# Altium PCB MicroMouse.PcbDoc (part 1 of 2)
Units mm, origin at the board's own origin, x right, y up, seen from the top; angles counter-clockwise.
Board outline 120.52 x 100.98 mm, 4 copper layers (Top Copper, Signal Layer 1, Signal Layer 2, Bottom Copper), stack 1.57 mm thick; 103 components, 72 nets, 374 pads, 447 vias.
Unrouted connection lines stored in the file: 1.
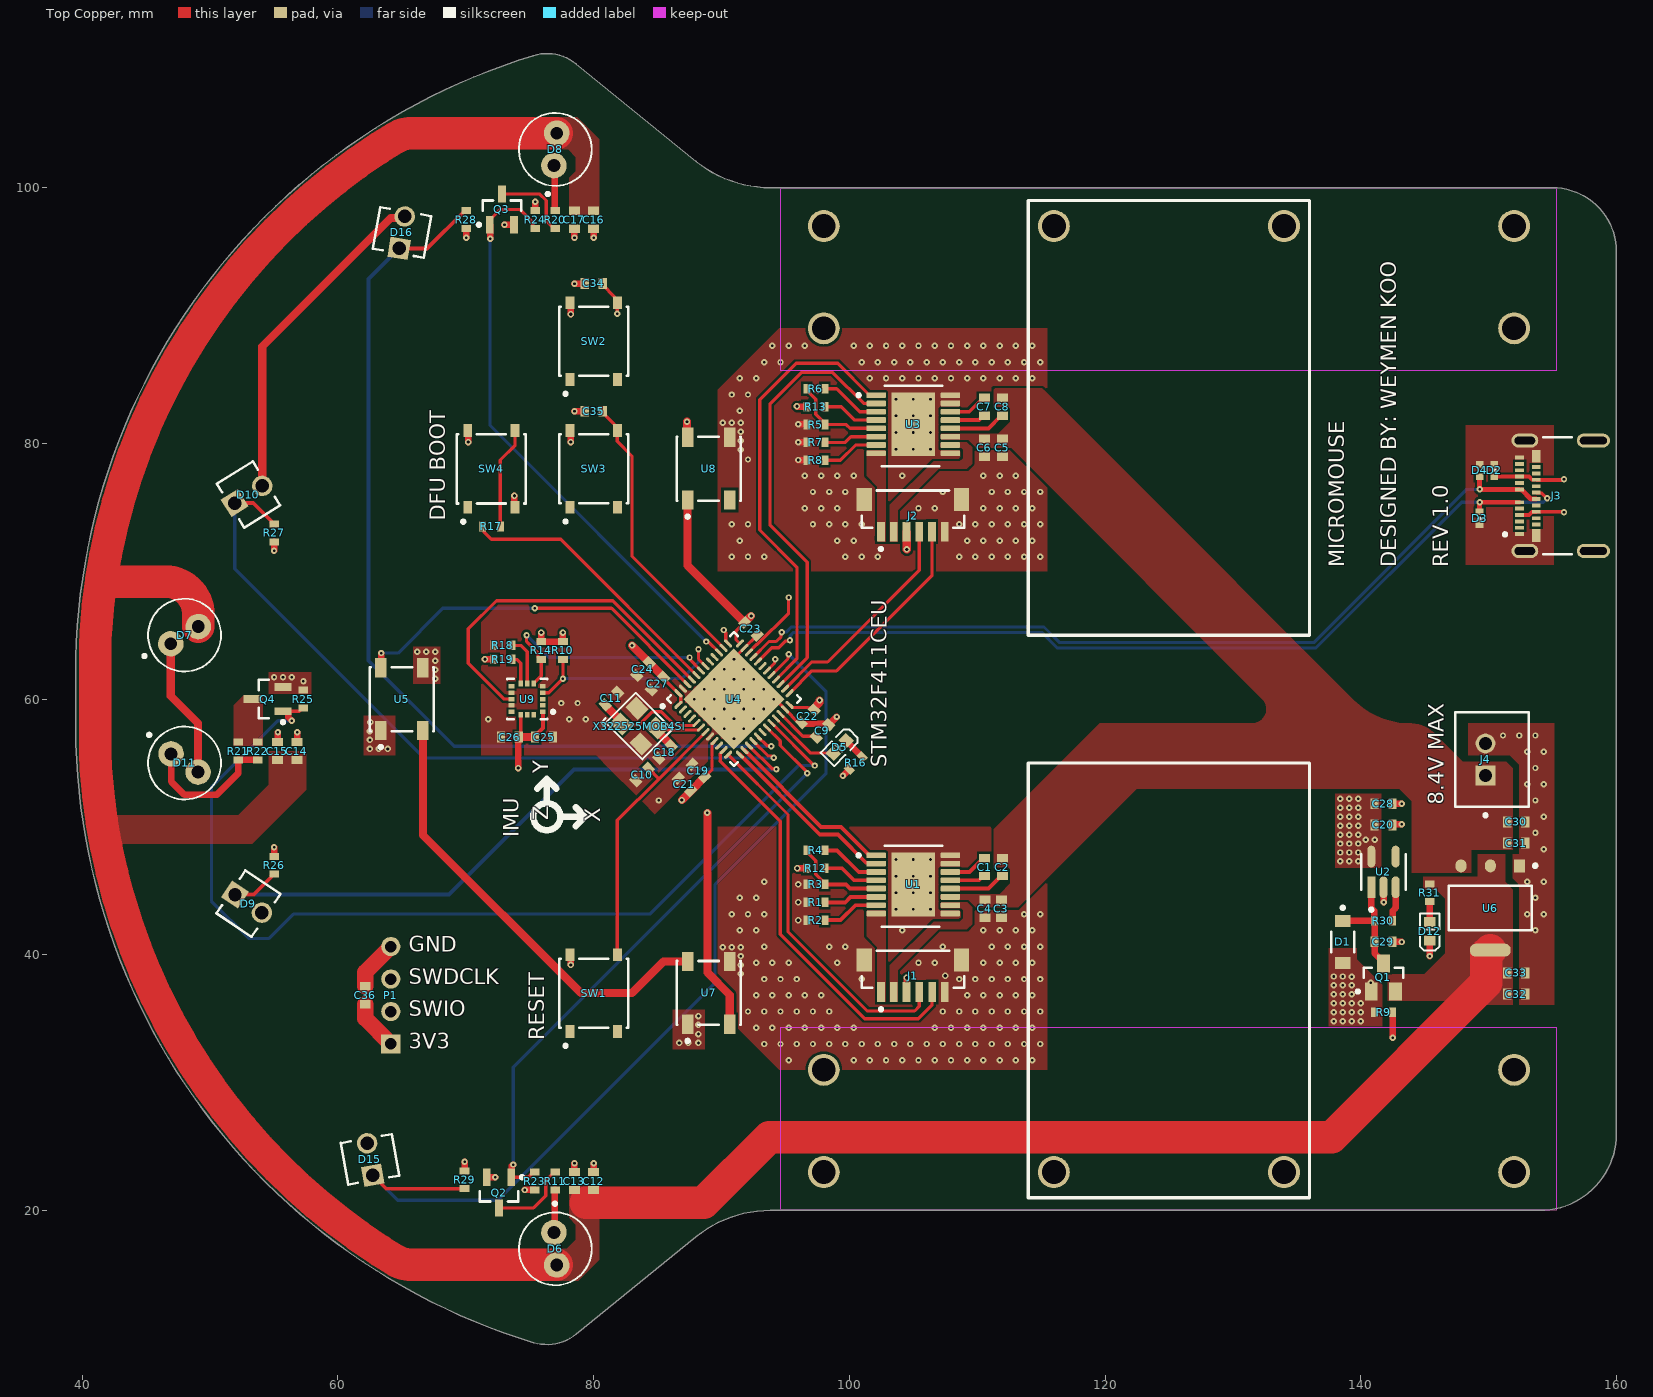
[diagram p0: Top Copper view]
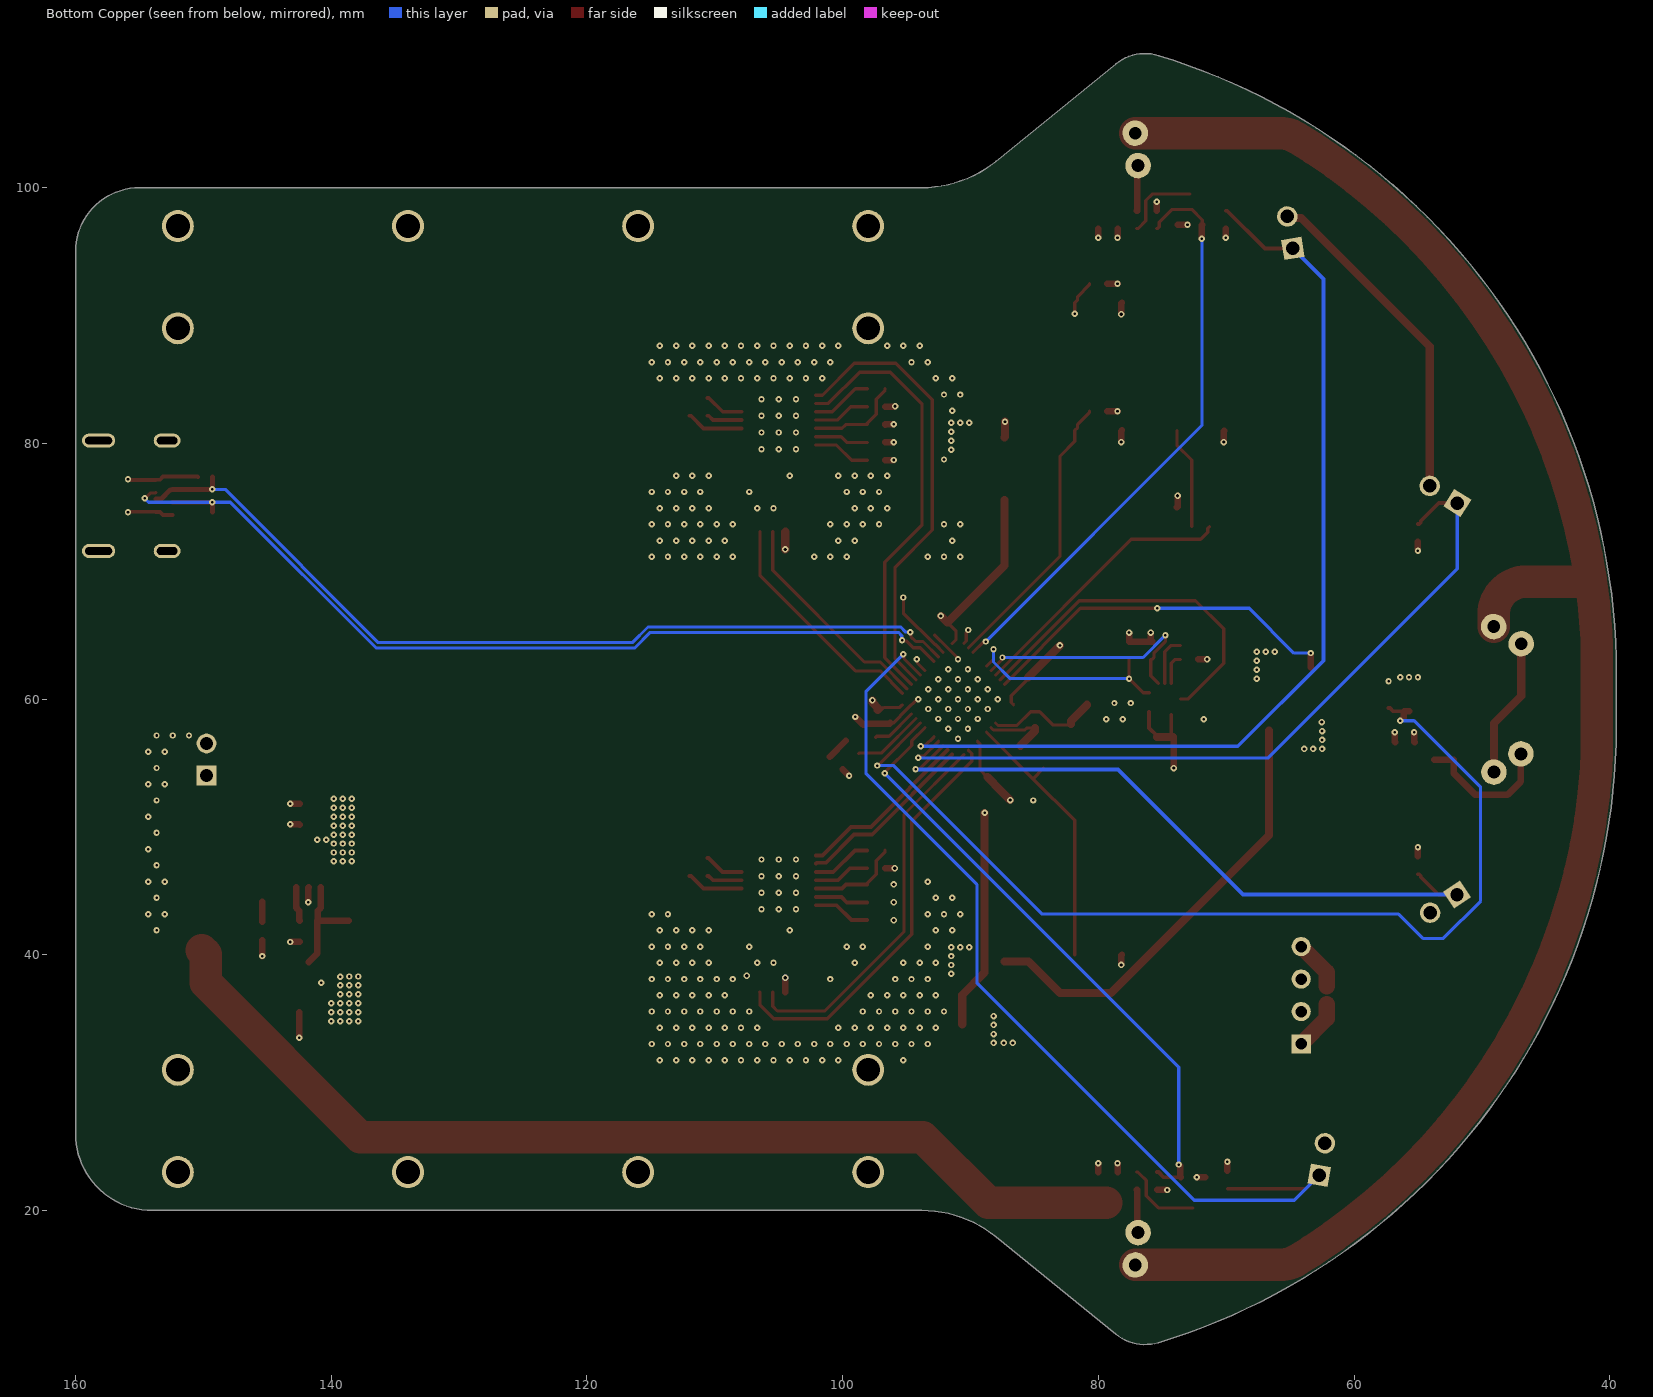
[diagram p1: Bottom Copper view, seen from below]
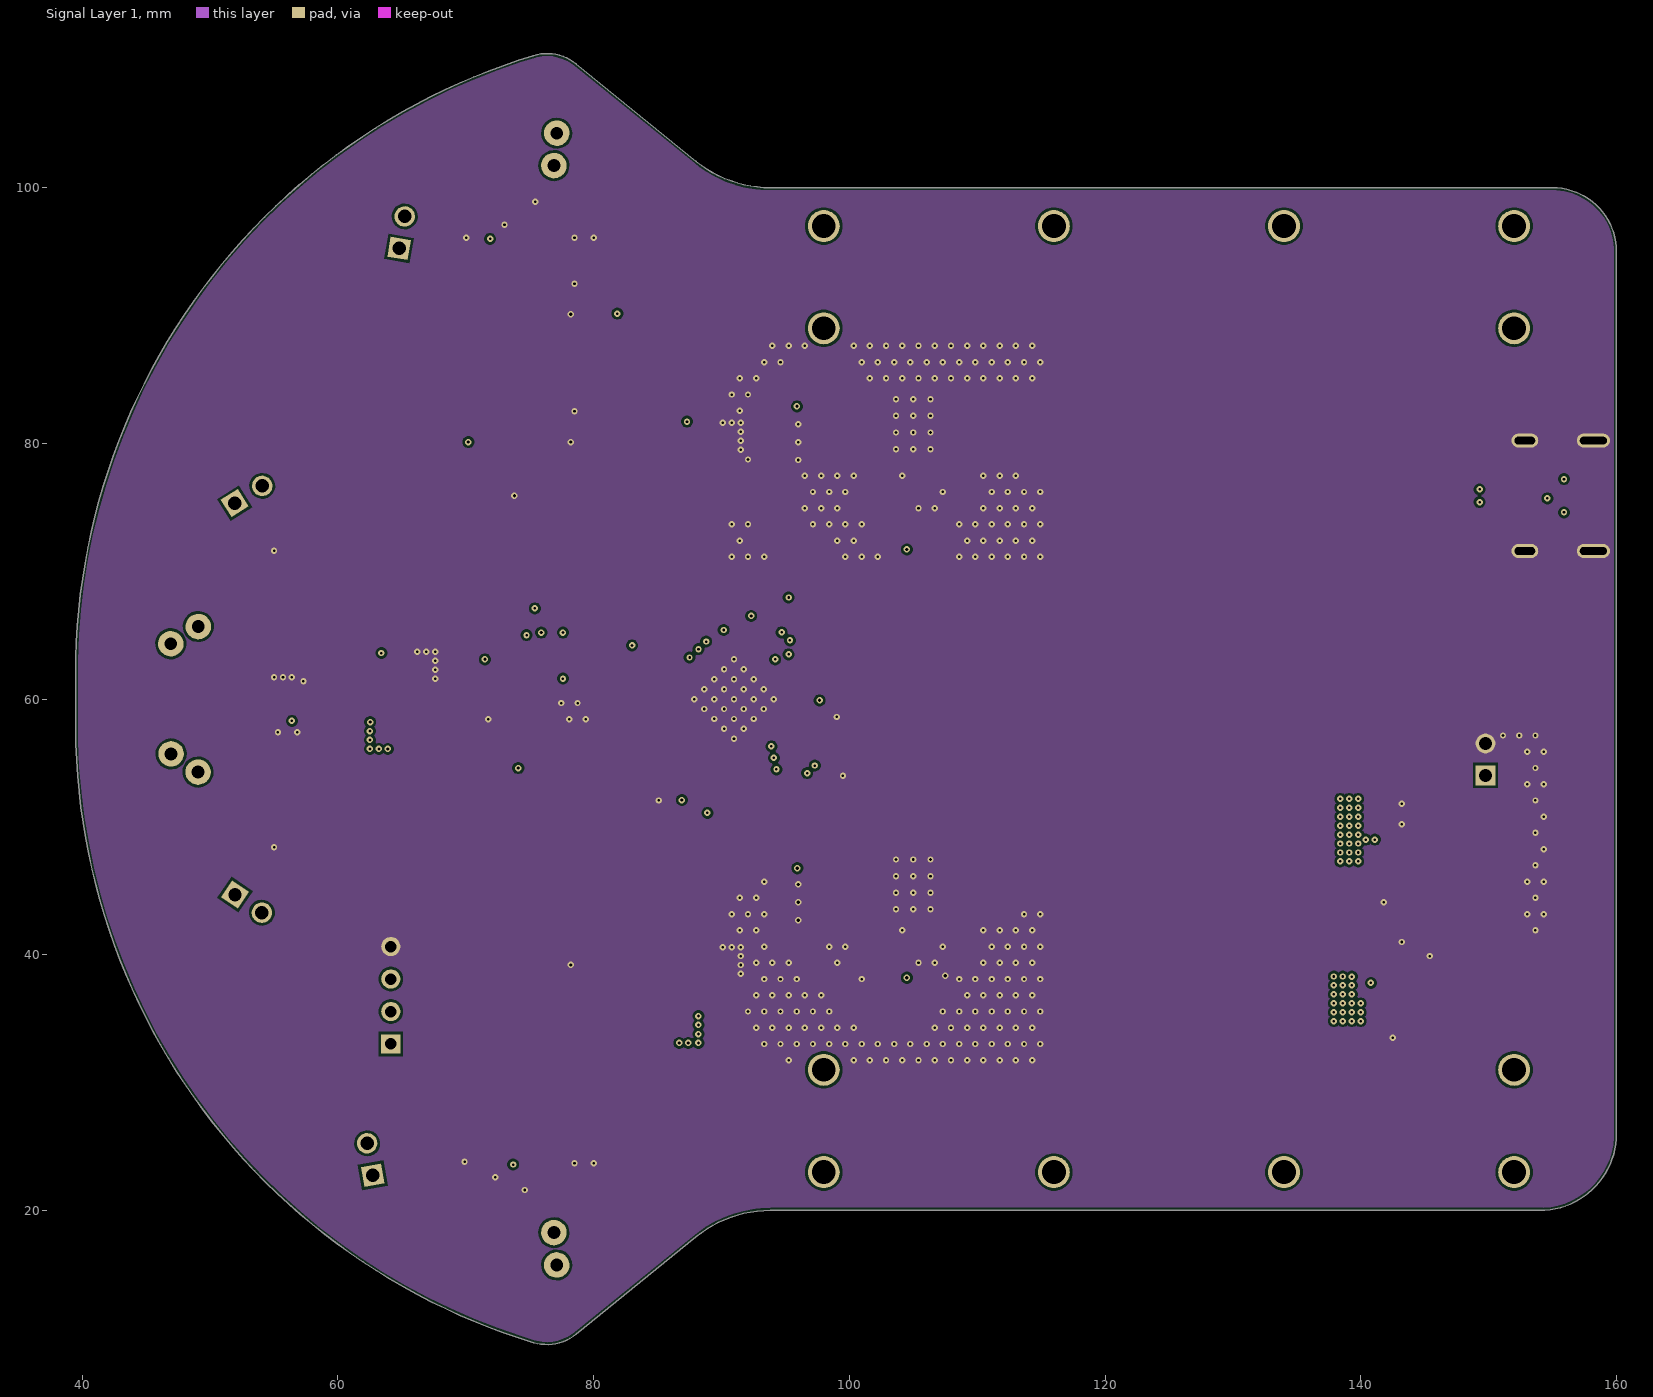
[diagram p2: Signal Layer 1]
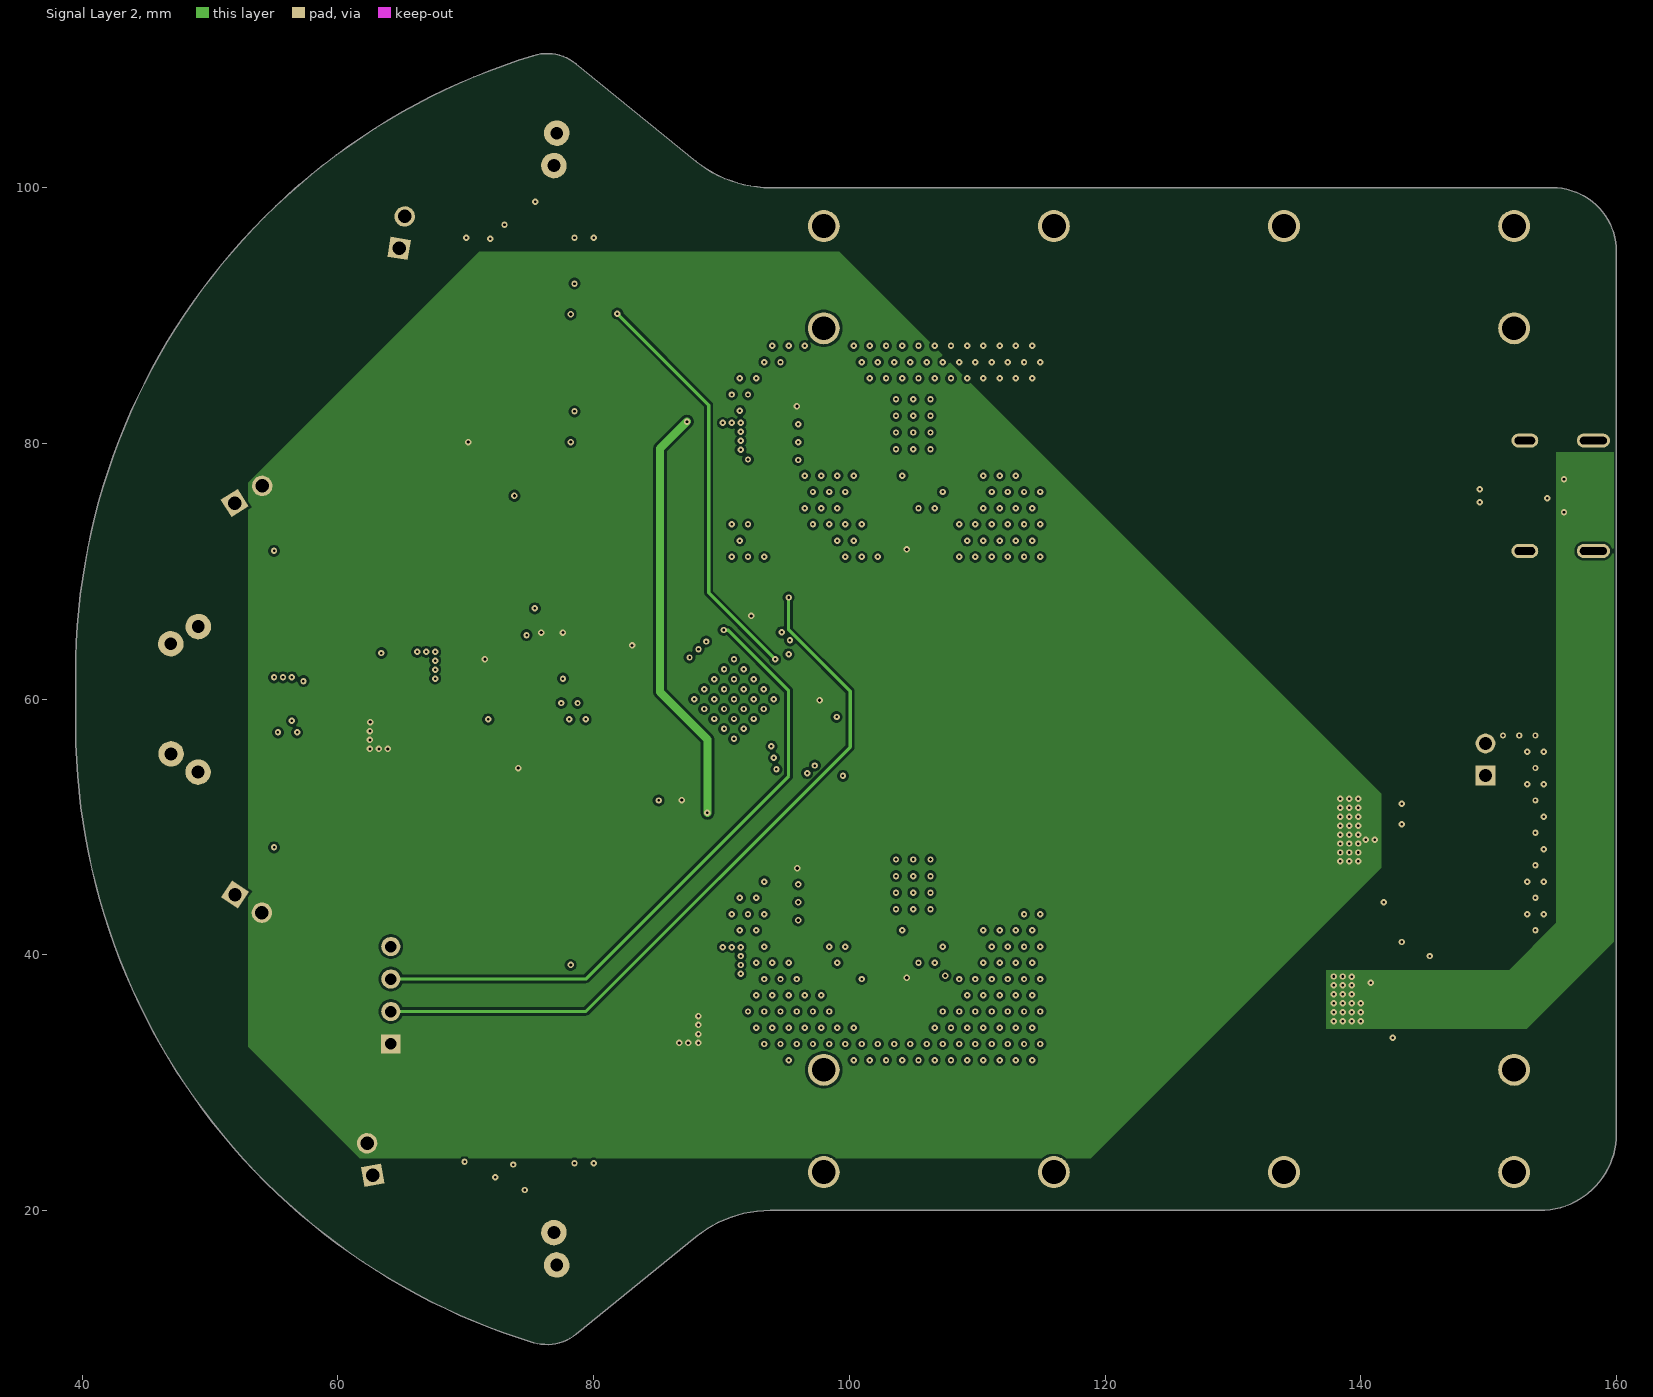
[diagram p3: Signal Layer 2]

## Layer stack, top to bottom
Top Mask: solder mask 0.015, Solder Resist, Dk 3.8
Top Copper: signal copper 0.035
Dielectric 1: prepreg 0.1, 2313, Dk 4.05
Signal Layer 1: signal copper 0.0175
Core: core 1.265, FR-4, Dk 4.5
Signal Layer 2: signal copper 0.0175
Dielectric 2: prepreg 0.1, 2313, Dk 4.05
Bottom Copper: signal copper 0.035
Bottom Mask: solder mask 0.015, Solder Resist, Dk 3.8

## Board outline
93.819,20 154,20 ccw(c154,26) 160,26 160,95 ccw(c155,95) 155,100 93.819,100 cw(c93.819,109.203) 88.02,102.057 78.624,109.682 ccw(c76.345,106.874) 75.292,110.334 ccw(c90,62) 39.478,62 39.479,57.699 ccw(c89.999,57.999) 75.294,9.666 ccw(c76.346,13.124) 78.624,10.318 88.019,17.943 cw(c93.819,10.796)

## Design rules (kind name [scope] priority, off if disabled: settings)
BoardOutlineClearance [All] p1: gap=0.2 ignorepadtopadclearanceinfootprint=FALSE except(0.4: Arc-SplitBarrior Arc-SplitContinuation Track-SplitBarrior Track-SplitContinuation SMDPad-SplitBarrior SMDPad-SplitContinuation THPad-SplitBarrior THPad-SplitContinuation Via-SplitBarrior Via-SplitContinuation Fill-SplitBarrior Fill-SplitContinuation Poly-SplitBarrior Poly-SplitContinuation Region-SplitBarrior Region-SplitContinuation Text-SplitBarrior Text-SplitContinuation)
Clearance "Clearance Bottom Layer" [OnLayer('Bottom Layer')] p1: gap=0.203 ignorepadtopadclearanceinfootprint=TRUE except(0.076: Arc-SMDPad Track-SMDPad SMDPad-SMDPad; 0.254: Arc-Text Track-Text SMDPad-Text THPad-Text Via-Text Fill-Text Poly-Text Region-Text Text-Text)
Clearance "Clearance Top Layer" [OnLayer('Top Layer')] p2: gap=0.203 ignorepadtopadclearanceinfootprint=TRUE except(0.076: Arc-SMDPad Track-SMDPad SMDPad-SMDPad; 0.254: Arc-Text Track-Text SMDPad-Text THPad-Text Via-Text Fill-Text Poly-Text Region-Text Text-Text)
Clearance [All] p3: gap=0.2 ignorepadtopadclearanceinfootprint=FALSE except(0.076: Arc-SMDPad Track-SMDPad SMDPad-SMDPad; 0.089: Arc-Arc Arc-Track Track-Track; 0.127: Arc-Via Track-Via SMDPad-Via THPad-Via Via-Via; 0.254: Arc-Text Track-Text SMDPad-Text THPad-Text Via-Text Fill-Text Poly-Text Region-Text Text-Text)
DiffPairsRouting [All] p1: maxlimit=0.254 minlimit=0.127 mostfreqgap=0.203 toplayer_minwidth=0.254 toplayer_maxwidth=0.381 toplayer_prefwidth=0.254 midlayer1_minwidth=0.254 midlayer1_maxwidth=0.381 midlayer1_prefwidth=0.254 midlayer2_minwidth=0.254 midlayer2_maxwidth=0.381 midlayer2_prefwidth=0.254 bottomlayer_minwidth=0.254 bottomlayer_maxwidth=0.381 bottomlayer_prefwidth=0.254 maxuncoupledlength=12.7
HoleSize [All] p1: absolutevalues=TRUE maxlimit=6.3 minlimit=0.2 maxpercent=80.000 minpercent=20.000
MinimumAnnularRing [All] p1: minimumring=0.076
MinimumSolderMaskSliver [All] p1: minsoldermaskwidth=0.018
PolygonConnect PolygonConnect_1 [All] p1: connectstyle=Direct reliefconductorwidth=0.508 reliefentries=4 polygonreliefangle="90 Angle" airgapwidth=0.254
RoutingCorners [All] p1: cornerstyle=Round minsetback=2.54 maxsetback=2.54
RoutingVias [All] p1: holewidth=0.5 width=1 viastyle="Through Hole" minholewidth=0.2 minwidth=0.45 maxholewidth=1 maxwidth=2
SilkToSilkClearance [All] p1: silktosilkclearance=0.025
SilkToSolderMaskClearance [IsPad] p1: minsilkscreentomaskgap=0.025 clearancetoexposedcopper=TRUE
SolderMaskExpansion [All] p1: expansion=0.102 istentingtop=FALSE
Width [All] p1: maxlimit=2.54 minlimit=0.089 preferedwidth=0.381
24 further rules are at their usual default settings.

## Classes and differential pairs
net class USB: MCU_USB_D_N MCU_USB_D_P
differential pair MCU_USB_D: +MCU_USB_D_P -MCU_USB_D_N

## Components (designator, comment, footprint, x,y, rotation, side; value= is the part's Value field where it differs from the comment)
C1 "0.022uF" "IPC C C0603 No Silk" 110.579,46.856 r270 top value=?F
C2 "0.1uF" "IPC C C0603 No Silk" 111.976,46.856 r270 top value=?F
C3 "4.7uF" "IPC C C0603 No Silk" 111.9,43.6 r270 top value=?F
C4 "0.1uF" "IPC C C0603 No Silk" 110.6,43.6 r270 top value=?F
C5 "4.7uF" "IPC C C0603 No Silk" 111.971,79.665 r270 top value=?F
C6 "0.1uF" "IPC C C0603 No Silk" 110.571,79.665 r270 top value=?F
C7 "0.022uF" "IPC C C0603 No Silk" 110.571,82.865 r270 top value=?F
C8 "0.1uF" "IPC C C0603 No Silk" 111.971,82.865 r270 top value=?F
C9 "2.2uF" "IPC C C0603 No Silk" 97.9,57.509 r225 top value=?F
C10 "100nF" "IPC C C0603 No Silk" 83.8,54.1 r225 top value=?F
C11 "15pF" "IPC C C0603 No Silk" 81.39,60.049 r45 top value=?F
C12 "100nF" "IPC C C0603 No Silk" 80,22.3 r270 top value=?F
C13 "4.7uF" "IPC C C0603 No Silk" 78.5,22.3 r270 top value=?F
C14 "100nF" "IPC C C0603 No Silk" 56.786,55.936 r270 top value=?F
C15 "4.7uF" "IPC C C0603 No Silk" 55.262,55.936 r270 top value=?F
C16 "100nF" "IPC C C0603 No Silk" 80,97.5 r90 top value=?F
C17 "4.7uF" "IPC C C0603 No Silk" 78.5,97.5 r90 top value=?F
C18 "15pF" "IPC C C0603 No Silk" 85.581,55.858 r225 top value=?F
C19 "2.2uF" "IPC C C0603 No Silk" 88.182,54.396 r315 top value=?F
C20 "10uF" "IPC C C0603 No Silk" 141.78,50.161 r180 top value=?F
C21 "100nF" "IPC C C0603 No Silk" 87.105,53.318 r135 top value=?F
C22 "100nF" "IPC C C0603 No Silk" 96.757,58.652 r225 top value=?F
C23 "100nF" "IPC C C0603 No Silk" 92.3,65.5 r315 top value=?F
C24 "100nF" "IPC C C0603 No Silk" 83.857,62.343 r225 top value=?F
C25 "10uF" "IPC C C0603 No Silk" 76.119,57.031 r0 top value=?F
C26 "100nF" "IPC C C0603 No Silk" 73.452,57.031 r180 top value=?F
C27 "100nF" "IPC C C0603 No Silk" 85,61.2 r225 top value=?F
C28 "1uF" "IPC C C0603 No Silk" 141.78,51.812 r180 top value=?F
C29 "10uF" "IPC C C0603 No Silk" 141.78,41.017 r180 top value=?F
C30 "10uF" "IPC C C0603 No Silk" 152.173,50.387 r0 top value=?F
C31 "100nF" "IPC C C0603 No Silk" 152.173,48.736 r0 top value=?F
C32 "10uF" "IPC C C0603 No Silk" 152.173,36.925 r0 top value=?F
C33 "100nF" "IPC C C0603 No Silk" 152.173,38.576 r0 top value=?F
C34 "100nF" "IPC C C0603 No Silk" 80,92.512 r180 top value=?F
C35 "100nF" "IPC C C0603 No Silk" 80,82.512 r180 top value=?F
C36 "100nF" "IPC C C0603 No Silk" 62.135,36.83 r90 top value=?F
D1 "MBR0540" FP-425-04-MFG 138.6,41 r270 top
D2 "RCLAMP0521P-N" 0402-TVS 150.441,77.876 r90 top
D3 "RCLAMP0521P-N" 0402-TVS 149.298,74.138 r270 top
D4 "RCLAMP0521P-N" 0402-TVS 149.304,77.876 r90 top
D5 "LED" LED0603-FD_BLUE 99.25,56.25 r45 top
D6 "SFH 4545" FP-SFH_4556-MFG 77,17 r275 top
D7 "SFH 4545" FP-SFH_4556-MFG 48,65 r32 top
D8 "SFH 4545" FP-SFH_4556-MFG 77,102.997 r85 top
D9 "TEFT4300" FP-6_544-5269_01-4-MFG 53,44 r326 top
D10 "TEFT4300" FP-6_544-5269_01-4-MFG 53,76 r32 top
D11 "SFH 4545" FP-SFH_4556-MFG 48,55 r326 top
D12 "LED" LED0603-FD_BLUE 145.4,41.844 r270 top
D15 "TEFT4300" FP-6_544-5269_01-4-MFG 62.5,24 r100 top
D16 "TEFT4300" FP-6_544-5269_01-4-MFG 65,96.5 r80 top
J1 "BM06B-SRSS-TBT(LF)(SN)" FP-BM06B-SRSS-TBT_LF_SN-MFG 104.976,38.856 r0 top
J2 "BM06B-SRSS-TBT(LF)(SN)" FP-BM06B-SRSS-TBT_LF_SN-MFG 104.971,74.865 r0 top
J3 "1054500101" FP-1054500101-MFG 156.2,75.9 r90 top
J4 "B2B-XH-A(LF)(SN)" FP-B2B-XH-A_LF_SN-MFG 150.284,55.278 r90 top
P1 "Header 4H" HDR1X4H 64.135,33.02 r90 top
Q1 "FDV304P" FAIR-SOT23-3_V 141.78,38.223 r90 top
Q2 "2N7002" INF-PG-SOT23_M 72.6,21.4 r270 top
Q3 "2N7002" INF-PG-SOT23_M 72.825,98.3 r90 top
Q4 "2N7002" INF-PG-SOT23_M 54.5,60 r180 top
R1 "2.49k" "IPC C R0603 No Silk" 97.38,44.103 r0 top value=?
R2 "20k" "IPC C R0603 No Silk" 97.38,42.706 r0 top value=?
R3 "0" "IPC C R0603 No Silk" 97.38,45.5 r180 top value=?
R4 "10k" "IPC C R0603 No Silk" 97.38,48.167 r180 top value=?
R5 "0" "IPC C R0603 No Silk" 97.38,81.475 r180 top value=?
R6 "10k" "IPC C R0603 No Silk" 97.38,84.269 r180 top value=?
R7 "2.49k" "IPC C R0603 No Silk" 97.38,80.078 r0 top value=?
R8 "20k" "IPC C R0603 No Silk" 97.38,78.681 r0 top value=?
R9 "100k" "IPC C R0603 No Silk" 141.791,35.496 r180 top value=?
R10 "2.2k" "IPC C R0603 No Silk" 77.6,63.8 r90 top value=?
R11 "10R" "IPC C R0603 No Silk" 77,22.3 r270 top value=?
R12 "10k" "IPC C R0603 No Silk" 97.38,46.77 r0 top value=?
R13 "10k" "IPC C R0603 No Silk" 97.38,82.872 r0 top value=?
R14 "2.2k" "IPC C R0603 No Silk" 75.9,63.8 r90 top value=?
R16 "1k" "IPC C R0603 No Silk" 100.5,55 r45 top value=?
R17 "10k" "IPC C R0603 No Silk" 72,73.5 r180 top value=?
R18 "10k" "IPC C R0603 No Silk" 72.9,64.2 r0 top value=?
R19 "10k" "IPC C R0603 No Silk" 72.9,63.1 r0 top value=?
R20 "10R" "IPC C R0603 No Silk" 77,97.5 r90 top value=?
R21 "5.6R" "IPC C R0603 No Silk" 52.214,55.936 r90 top value=?
R22 "5.6R" "IPC C R0603 No Silk" 53.738,55.936 r90 top value=?
R23 "4.7k" "IPC C R0603 No Silk" 75.4,22.3 r90 top value=?
R24 "4.7k" "IPC C R0603 No Silk" 75.425,97.5 r270 top value=?
R25 "4.7k" "IPC C R0603 No Silk" 57.3,60 r270 top value=?
R26 "1.8k" "IPC C R0603 No Silk" 55,47 r270 top value=?
R27 "1.8k" "IPC C R0603 No Silk" 55,73 r90 top value=?
R28 "1.8k" "IPC C R0603 No Silk" 70.025,97.5 r90 top value=?
R29 "1.8k" "IPC C R0603 No Silk" 69.9,22.4 r270 top value=?
R30 "10k" "IPC C R0603 No Silk" 141.78,42.668 r0 top value=?
R31 "1k" "IPC C R0603 No Silk" 145.4,44.85 r90 top value=?
SW1 "Reset" FP-PTS526SK15SMTR2LFS-MFG 80,37 r90 top
SW2 "Reset" FP-PTS526SK15SMTR2LFS-MFG 80,88 r90 top
SW3 "Reset" FP-PTS526SK15SMTR2LFS-MFG 80,78.012 r90 top
SW4 "DFU_Boot" FP-PTS526SK15SMTR2LFS-MFG 72,78 r90 top
U1 "DRV8874PWPR" FP-PWP0016J-MFG 105,45.5 r0 top
U2 "AP2112K-3.3TRG1" FP-SOT25-IPC_A 141.78,46.478 r90 top
U3 "DRV8874PWPR" FP-PWP0016J-MFG 105,81.5 r0 top
U4 "STM32F411CEU6" STM-UFQFPN48_L 90.978,60 r45 top
U5 "1655" ADA-RGB-1655_V 65,60 r90 top
U6 "ams1117" FP-ams1117-IPC_C 150.141,43.656 r270 top
U7 "1655" ADA-RGB-1655_V 89,37.012 r90 top
U8 "1655" ADA-RGB-1655_V 89,78.023 r90 top
U9 "LIS3DHTR" FP-LGA-16-7983231-MFG 74.8,60 r180 top
X322525MOB4SI "25Mhz" OSC-SMD_4P-L3.2-W2.5-BL 83.549,57.89 r315 top value=25MHz

## Footprints (in the part's own frame and the unit in brackets; to place one, negate y for a bottom-side part, rotate by r counter-clockwise, add the part's x,y. Pads: shape width x height; smd on the part's side, far side on the other; paste and mask are expansions set on the pad)
0402-TVS [mil] "0402-TVS"
  rect 20x24 smd: A(20,0) C(-19.68,0)
  silkscreen extent -3,-6 3,6, body extent -20,-10 20,10, height 20
ADA-RGB-1655_V [mm] "SMD, 4-Leads, Body 5x5mm"
  rect 1.5x0.9 smd: 1(-2.45,1.65) 2(-2.45,-1.65) 3(2.45,-1.65) 4(2.45,1.65)
  silkscreen extent -3.87,-2.5 2.5,2.5, body extent -2.7,-2.5 2.7,2.5, height 1.68
FAIR-SOT23-3_V [mm] "SOT23, 3-Leads, Body 3.12x1.5mm, Pitch 0.95mm"
  rect 1.4x1 smd: 1(-1.1,0.95) 2(-1.1,-0.95) 3(1.1,0)
  silkscreen extent -1.22,-1.55 0.75,2.12, body extent -1.35,-1.56 1.35,1.56, height 1.2
FP-6_544-5269_01-4-MFG [mm]
  rect 1.6x1.6 hole 1.05 paste-2539.97 mask+0: 1(-1.27,0)
  round 1.6 hole 1.05 paste-2539.97 mask+0: 2(1.27,0)
  silkscreen extent -1.65,-2.03 1.65,2.03, body extent -2.17,-2.13 2.17,2.13, height 0.25
FP-425-04-MFG [mil]
  rect 36x48 smd paste+0 mask+0: 1(-64.5,0) 2(64.5,0)
  silkscreen extent -110,-35 32,35, body extent -86,-39 86,39, height 10
FP-1054500101-MFG [mm]
  rrect100% 1.1x2.1 hole 1.6 slot 0.6 at 0 deg paste-2539.97 mask+0: 1(-4.32,3.36) 2(4.32,3.36)
  rrect100% 1.1x2.6 hole 2.1 slot 0.6 at 0 deg paste-2539.97 mask+0: 3(-4.32,-2) 4(4.32,-2)
  rect 0.3x0.7 smd paste+0 mask+0: A1(-3,3.77) A2(-2.5,3.77) A3(-2,3.77) A4(-1.5,3.77) A5(-1,3.77) A6(-0.5,3.77) A7(0.5,3.77) A8(1,3.77) A9(1.5,3.77) A10(2,3.77) A11(2.5,3.77) A12(3,3.77) B2(2.25,2.47) B3(1.75,2.47) B4(1.25,2.47) B5(0.75,2.47) B6(0.25,2.47) B7(-0.25,2.47) B8(-0.75,2.47) B9(-1.25,2.47) B10(-1.75,2.47) B11(-2.25,2.47)
  rect 1x0.7 smd paste+0 mask+0: B1(3.1,2.47) B12(-3.1,2.47)
  silkscreen extent -4.57,-0.3 4.57,5.03
FP-ams1117-IPC_C [mm]
  rect 1.004x0.872 smd paste+0 mask+0: 1(-3.295,2.29)
  rrect100% 1.004x0.872 smd paste+0 mask+0: 2(-3.295,0) 3(-3.295,-2.29)
  rrect87% 1.004x3.182 smd paste+0 mask+0: 4(3.295,0)
  silkscreen extent -3.42,-3.25 1.75,3.63, body extent -3.9,-3.35 3.9,3.35, height 0.25
FP-B2B-XH-A_LF_SN-MFG [mm]
  rect 1.55x1.55 hole 1 paste-2539.97 mask+0: 1(-1.25,0.525)
  round 1.55 hole 1 paste-2539.97 mask+0: 2(1.25,0.525)
  silkscreen extent -4.5,-2.88 3.7,2.88, body extent -3.8,-2.98 3.8,2.98, height 0.25
FP-BM06B-SRSS-TBT_LF_SN-MFG [mm]
  rect 0.6x1.55 smd paste+0 mask+0: 1(-2.5,-1.775) 2(-1.5,-1.775) 3(-0.5,-1.775) 4(0.5,-1.775) 5(1.5,-1.775) 6(2.5,-1.775)
  rect 1.2x1.8 smd paste+0 mask+0: 7(-3.8,0.75) 8(3.8,0.75)
  silkscreen extent -4,-3.25 4,1.45, body extent -4.5,-2.65 4.5,1.75, height 0.25
FP-LGA-16-7983231-MFG [mm]
  rect 0.45x0.35 smd paste-1000 mask+0: 1(-1.225,1) 2(-1.225,0.5) 3(-1.225,0) 4(-1.225,-0.5) 5(-1.225,-1) 9(1.225,-1) 10(1.225,-0.5) 11(1.225,0) 12(1.225,0.5) 13(1.225,1)
  rect 0.35x0.45 smd paste-1000 mask+0: 6(-0.5,-1.225) 7(0,-1.225) 8(0.5,-1.225) 14(0.5,1.225) 15(0,1.225) 16(-0.5,1.225)
  silkscreen extent -2.15,-1.58 1.58,1.58, body extent -2.07,-2.07 2.07,2.07, height 0.25
FP-PTS526SK15SMTR2LFS-MFG [mm]
  rect 1x0.7 smd paste+0 mask+0: 1(-3,1.85) 2(3,1.85) 3(-3,-1.85) 4(3,-1.85)
  silkscreen extent -4.25,-2.7 2.7,2.7, body extent -3.6,-2.8 3.6,2.8, height 0.25
FP-PWP0016J-MFG [mm]
  rrect22% 1.5x0.45 smd paste+0 mask+0: 1(-2.9,2.275) 2(-2.9,1.625) 3(-2.9,0.975) 4(-2.9,0.325) 5(-2.9,-0.325) 6(-2.9,-0.975) 7(-2.9,-1.625) 8(-2.9,-2.275) 9(2.9,-2.275) 10(2.9,-1.625) 11(2.9,-0.975) 12(2.9,-0.325) 13(2.9,0.325) 14(2.9,0.975) 15(2.9,1.625) 16(2.9,2.275)
  rect 3.4x5 smd paste-1000 mask-1000: 17(0,0)
  silkscreen extent -4.4,-3.3 2.27,3.03, body extent -3.75,-2.8 3.75,2.8, height 0.25
FP-SFH_4556-MFG [mm]
  round 2 hole 1 paste-2539.97 mask+0: 1(-1.27,0) 2(1.27,0)
  silkscreen extent -3.65,-2.85 2.85,2.85, body extent -2.95,-2.95 2.95,2.95, height 0.25
FP-SOT25-IPC_A [mm]
  rect 1.707x0.616 smd paste+0 mask+0: 1(-1.201,0.95)
  rrect100% 1.707x0.616 smd paste+0 mask+0: 2(-1.201,0) 3(-1.201,-0.95) 4(1.201,-0.95) 5(1.201,0.95)
  silkscreen extent -3.08,-1.75 1.4,1.75, body extent -2.55,-2 2.55,2, height 0.25
HDR1X4H [mm] "Connector; Header; 4 Position; Right Angle"
  rect 1.5x1.5 hole 0.9: 1(0,0)
  round 1.5 hole 0.9: 2(2.54,0) 3(5.08,0) 4(7.62,0)
INF-PG-SOT23_M [mm] "SOT23, 3-Leads, Body 2.9x1.3mm, Pitch 0.95mm, IPC Low Density"
  rect 1.35x0.6 smd: 1(-1.2,0.95) 2(-1.2,-0.95) 3(1.2,0)
  silkscreen extent -1.32,-1.5 0.7,1.93, body extent -0.7,-1.5 0.7,1.5, height 1.1
"IPC C C0603 No Silk" [mm] "Chip Capacitor, 2-Leads, Body 1.60x0.80mm, IPC High Density"
  rect 0.65x0.85 smd: 1(-0.7,0) 2(0.7,0)
  body extent -0.8,-0.4 0.8,0.4, height 0.8
"IPC C R0603 No Silk" [mm] "Chip Resistor, 2-Leads, Body 1.60x0.80mm, IPC High Density"
  rect 0.55x0.75 smd: 1(-0.7,0) 2(0.7,0)
  body extent -0.8,-0.4 0.8,0.4, height 0.4
LED0603-FD_BLUE [mm]
  rect 0.8x0.9 smd mask+0.051: 1(-0.72,0) 2(0.72,0)
  silkscreen extent -1.38,-0.76 1.5,0.76
OSC-SMD_4P-L3.2-W2.5-BL [mm]
  rect 1.4x1.2 smd mask+0.051: 1(-1.1,-0.875) 2(1.1,-0.875) 3(1.1,0.875) 4(-1.1,0.875)
  silkscreen extent -2.29,-1.9 2.03,1.65
STM-UFQFPN48_L [mm] "QFN, 48-Leads, Body 7.1x7.1mm, Pitch 0.5mm, Thermal Pad 5.6x5.6mm, IPC High Density"
  oval 0.8x0.25 smd: 1(-3.4,2.75) 2(-3.4,2.25) 3(-3.4,1.75) 4(-3.4,1.25) 5(-3.4,0.75) 6(-3.4,0.25) 7(-3.4,-0.25) 8(-3.4,-0.75) 9(-3.4,-1.25) 10(-3.4,-1.75) 11(-3.4,-2.25) 12(-3.4,-2.75) 25(3.4,-2.75) 26(3.4,-2.25) 27(3.4,-1.75) 28(3.4,-1.25) 29(3.4,-0.75) 30(3.4,-0.25) 31(3.4,0.25) 32(3.4,0.75) 33(3.4,1.25) 34(3.4,1.75) 35(3.4,2.25) 36(3.4,2.75)
  oval 0.25x0.8 smd: 13(-2.75,-3.4) 14(-2.25,-3.4) 15(-1.75,-3.4) 16(-1.25,-3.4) 17(-0.75,-3.4) 18(-0.25,-3.4) 19(0.25,-3.4) 20(0.75,-3.4) 21(1.25,-3.4) 22(1.75,-3.4) 23(2.25,-3.4) 24(2.75,-3.4) 37(2.75,3.4) 38(2.25,3.4) 39(1.75,3.4) 40(1.25,3.4) 41(0.75,3.4) 42(0.25,3.4) 43(-0.25,3.4) 44(-0.75,3.4) 45(-1.25,3.4) 46(-1.75,3.4) 47(-2.25,3.4) 48(-2.75,3.4)
  rect 5.6x5.6 smd: 49(0,0)
  silkscreen extent -4.47,-3.7 3.7,3.7, body extent -3.55,-3.55 3.55,3.55, height 0.6

## Part data
C1 C3 C4 C5 C6 C7 C9 C10 C11 C12 C13 C14 C15 C16 C17 C18 C19 C20 C21 C22 C23 C24 C25 C26 C27 C28 C29 C30 C31 C32 C33 C34 C35 C36: library part CMP-026-000001-1, Add into BOM=yes, Convert to PCB=yes, Design Item ID="Generic CAP 0603", Source=Schlib1.SchLib, Supplier Footprint=0402
C2 C8: library part CMP-026-000001-1, "16V rated", Add into BOM=yes, Convert to PCB=yes, Design Item ID="Generic CAP 0603", Source=Schlib1.SchLib, Supplier Footprint=0402
D1: library part CMP-2000-05114-2, "DIODE SCHOTTKY 40V 500MA SOD123", Average Rectified Current=500mA, Current Rating=500A, Forward Voltage=620mV, Max Forward Surge Current (Ifsm)=5.5A, Max Operating Temperature=125°C, Max Repetitive Reverse Voltage (Vrrm)=40V, Max Reverse Leakage Current=20uA, Min Operating Temperature=-65°C, Package Quantity=3000, Power Dissipation=400mW, Contact Plating=Tin, Element Configuration=Single, Forward Current=500mA, Height=1.03mm, Lead Free="Lead Free", Length=2.7mm, Max Reverse Voltage (DC)=40V, Max Surge Current=5.5A, Mount="Surface Mount", Number of Pins=2, Output Current=500mA, Packaging="Tape and Reel", Peak Non-Repetitive Surge Current=5.5A, Peak Reverse Current=20uA, Polarity=Standard, Radiation Hardening=No, REACH SVHC="No SVHC", Voltage Rating (DC)=40V, Weight=0.03g, Width=1.6mm
D2 D3 D4: library part CMP-016-000000-1, "Diode, TVS, 14VWM, 40VC, 0402, SMD", Design Item ID=DIODE-TVS, Source=CB_REV_C.SCHLIB
D5 D12: library part CMP-030-000001-1, Add into BOM=yes, Convert to PCB=yes, Design Item ID="Generic LED 0603", Source=Schlib1.SchLib, Supplier Footprint=0603
D6 D7 D8 D11: library part CMP-62016-000017-1, "EMITTER IR 860NM 100MA RADIAL", Colour=Infrared, Forward Current=100mA, Forward Voltage=1.5V, Manufacturer="Osram Opto", Manufacturer Part Number="SFH 4556", Reverse Voltage=12V, Temperature="-40°C to +100°C", Temperature Range High=+100°C, Temperature Range Low=-40°C, Automotive=No, Category=Diode, ComponentLink2Description=Datasheet, ComponentLink2URL=https://dammedia.osram.info/media/resource/hires/osram-dam-2496340/SFH%204556.pdf, Device Class L1=Optoelectronics, Device Class L2=LEDs, Device Class L3=unset, Digikey Description="EMITTER IR 860NM 100MA RADIAL", Lead Free=Yes, Led Orientation=Straight, Mouser Description="SFH 4556 Osram Opto, 860nm IR LED, 5mm (T-1 3/4) Through Hole package", Octopart=https://octopart.com/sfh+4556-osram+opto-31094094, Package="SFH 4556", Peak Emmision Wavelength=860nm, RoHS=TRUE, Viewing Angle=40°
D9 D10 D15 D16: library part CMP-00030-39729854-1, "TEFT4300 PHOTOTRANSISTOR 3.0MM WIDE VIEW / Phototransistor IR Chip Silicon 925nm 2-Pin T-1", Case/Package=T, Collector Emitter Breakdown Voltage=70V, Collector Emitter Saturation Voltage=300mV, Dark Current=200nA, Max Collector Current=50mA, Max Operating Temperature=100°C, Max Power Dissipation=100mW, Min Operating Temperature=-40°C, Collector Emitter Voltage (VCEO)=70V, Fall Time=2.3µs, Height=4.5mm, Lead Free="Lead Free", Length=3.2mm, Lens Style=Domed, Mount="Through Hole", NexarPartId=39729854, Number of Channels=1, Number of Elements=1, Number of Pins=2, Orientation="Top View", Polarity=NPN, Power Consumption=100mW, Power Dissipation=100mW, Radiation Hardening=No, REACH SVHC=Unknown, Rise Time=2µs, RoHS=Compliant, Schedule B="8541407080, 8541407080", Viewing Angle=30°, Wavelength=925nm, Width=3.9mm
J1 J2: library part CMP-17439-000255-1, "CONN HEADER SMD 6POS 1MM", Color=Natural, Contact Resistance=20mR, Current Rating=1A, Flammability Rating="UL94 V-0", Insulation Resistance=100MR, Max Operating Temperature=85°C, Max Voltage Rating (AC)=50V, Min Operating Temperature=-25°C, Package Quantity=1, Connector Type=Header, Contact Finish - Mating=TIN, Contact Material="Copper Alloy", Contact Plating=Tin, Contact Shape=Square, Contact Type="Male Pin", Depth=3.6mm, Fastening Type=Pull, Gender=Male, Housing Color=Natural, Housing Material=Polyamide, Insulation Color=Natural, Insulation Material=Nylon, Lead Free="Lead Free", Length=8mm, Mated Stacking Heights=4.9mm, Material=Polyamide, Max Current Rating=1A, Max Voltage Rating (DC)=50V, Mount="Surface Mount", Number of Positions=6, Number of Rows=1, Orientation=Straight, Packaging="Tape and Reel", Pitch=1mm, Series=SR, Termination=Solder, Voltage Rating=50V
J3: library part CMP-04767-000004-1, "CONN RCP USB3.1 TYPEC 24P SMD RA", Current Rating=0.25/1.25/5A, Manufacturer=Molex, Package=0, Temperature="-30°C to +85°C", Temperature Range High=+85°C, Temperature Range Low=-30°C, Voltage Rating=30V, Automotive=No, Category=Conn, ComponentLink2Description=Datasheet, ComponentLink2URL=https://www.molex.com/webdocs/datasheets/pdf/en-us/1054500101_IO_CONNECTORS.pdf, Conn Orientation="Right Angle", Contact Material=Gold,Nickel, Device Class L1=Connectors, Device Class L2="USB Connectors", Device Class L3=unset, Digikey Description="CONN RCP USB3.1 TYPEC 24P SMD RA", Footprint Url=https://www.molex.com/pdm_docs/sd/1054500101_sd.pdf, Height=3.44mm, Is Female=yes, Lead Free=Yes, Manufacturer Part Number=1054500101, Mouser Description="USB Shielded I/O Receptacle; Type C; Right Angle; Surface Mount; Gold over Nickel", Number Of Contacts=24, Octopart=https://octopart.com/105450-0101-molex-68082325, Pitch=0.5mm, RoHS=TRUE, Shielding=true, Usb Standard="USB 3.1"
J4: library part CMP-2000-05888-3, "CONN HEADER VERT 2POS 2.5MM", Color=Natural, Contact Resistance=20mR, Current Rating=3A, Housing Color=White, Insulation Resistance=1GR, Max Operating Temperature=85°C, Max Voltage Rating (AC)=250V, Min Operating Temperature=-25°C, Connector Type="Male Pin", Contact Material=Brass, Contact Plating=Tin, Contact Type="Male Pin", Depth=5.75mm, Fastening Type=Detent, Housing Material=Polyamide, Lead Free="Lead Free", Lead Pitch=2.5mm, Length=7.4mm, Max Current Rating=3A, Max Voltage Rating (DC)=250V, Mount="Through Hole", Number Of Contacts=2, Number of Positions=2, Number of Rows=1, Orientation=Straight, Packaging=Bulk, Pitch=2.5mm, REACH SVHC="No SVHC", Series=XH, Termination=Solder, Voltage Rating=250V, Voltage Rating (AC)=250V, Wire/Cable Gauge=22AWG
P1: library part CMP-007-000098-1, "Header, 4-Pin, Right Angle", Component Type=Standard, Design Item ID="Header 4H", LatestRevisionDate=17-Jul-2002, LatestRevisionNote="Re-released for DXP Platform.", Pin Count=4, Publisher="Altium Limited", Source="Miscellaneous Connectors.SchLib"
Q1: library part CMP-2000-06263-1, "P-Channel Digital FET, -25 V, -0.46 A, 0.35 W, -55 to 150 degC, 3-Pin SOT-23, -55 to 150 degC, RoHS, Tape and Reel", Manufacturer=FairchildSemiconductor, Maximum Continuous Drain Current=0.46A, Maximum Drain Source Voltage=25V, Maximum Gate Source Voltage=8V, Operating Temperature=-55to150°C, Package=3SOT-23, Package Description="3-Pin Small Outline Transistor, Body 2.92 x 1.325 mm, Pitch 0.95 mm", Package Reference=SOT23-3, Package Version="Rev. 12, 03/2016", Category=MOSFET, Channel Mode=Enhancement, Channel Type=P, Datasheet URL=https://www.fairchildsemi.com/datasheets/FD/FDV304P.pdf, Datasheet Version="Rev. E1, 08/1997", Manufacturer URL=https://www.fairchildsemi.com/, Mounting=SurfaceMount, Mounting Technology=SurfaceMount, Package URL=http://www.fairchildsemi.com/dwg/MA/MA03D.pdf, Packaging=Tape&Reel, Rad Hard=No, RDS-on=1100@4.5VmOhm, Typical Fall Time=35ns, Typical Rise Time=8ns, Typical Turn-Off Delay Time=55ns, Typical Turn-On Delay Time=6ns
Q2 Q3 Q4: library part CMP-1149-00026-1, "N-Channel OptiMOS Small-Signal-Transistor, 60 V VDS, 0.3 A ID, -55 to 150 degC, PG-SOT23, Reel, Green", Manufacturer=Infineon, ComponentLink1Description="Manufacturer URL", ComponentLink1URL=http://www.infineon.com/, ComponentLink2Description=Datasheet, ComponentLink2URL=http://www.infineon.com/dgdl/2N7002_Rev2.4.pdf?folderId=db3a3043156fd573011622e10b5c1f67&fileId=db3a304319bc939a0119c2a9461e79e6, ComponentLink3Description="Package Specification", ComponentLink3URL=http://www.infineon.com/dgdl/SOT23-Package_Overview.pdf?folderId=db3a30431936bc4b0119532290053c66&fileId=db3a30431936bc4b0119533468123c85, DatasheetVersion="Rev. 2.4", Green=TRUE, Halogen-free=TRUE, ID (max)="0.3Â A", IDpuls (max)="1.2Â A", Mounting Technology="Surface Mount", PackageDescription="3-Pin Small Outline Transistor Package, 2.9 x 1.3 mm Body, 0.95 mm Pitch", PackageReference=PG-SOT23, PackageVersion=Apr-08, Packing=Reel, PartNumber=2N7002, Ptot (max)="0.5Â W", QG="0.4Â nC", RDS (on) (max)="3,000 mOhm", RDS (on) (max) (@4.5V)="4,000 mOhm", RthJA (max)="250 K/W", VDS (max)="60 V", VGS(th) (max)="2.5Â V", VGS(th) (min)="1.5Â V"
R1 R2 R3 R4 R5 R6 R7 R8 R9 R10 R11 R12 R13 R14 R16 R17 R18 R19 R20 R21 R22 R23 R24 R25 R26 R27 R28 R29 R30 R31: library part CMP-032-000001-1, Add into BOM=yes, Convert to PCB=yes, Design Item ID="Generic RES 0603", Source=Schlib1.SchLib, Supplier Footprint=0402
SW1 SW2 SW3 SW4: library part CMP-10040-000013-1, "TACT 5.2 X 5.2, 1.5 MM H, 260GF,", Contact Current Rating=50mA, Contact Resistance=100mΩ, Manufacturer=C&K, Manufacturer Part Number=PTS526SK15SMTR2LFS, Operating Force=250gf, Temperature="-20°C to +70°C", Temperature Range High=+70°C, Temperature Range Low=-20°C, Voltage Rating Dc=12V, Automotive=No, Category=Switch, ComponentLink2Description=Datasheet, ComponentLink2URL=https://www.ckswitches.com/media/2780/pts526.pdf, Device Class L1=Electromechanical, Device Class L2=Switches, Device Class L3="Tactile Switches", Digikey Description="TACT 5.2 X 5.2, 1.5 MM H, 260GF,", Electromechanical Life=200000Cycles, Height=1.65mm, Lead Free=Yes, Octopart=https://octopart.com/pts526+sk15+smtr2+lfs-c%26k+components-100617999, Package=PTS526SK15SMTR2LFS, RoHS=TRUE, Standoff Height=0mm, Throw Configuration=SPST-NO
U1 U3: library part CMP-04915-000011-1, "DRV8874 H-BRIDGE MOTOR DRIVER", RoHS Compliant=Yes
U2: library part CMP-12756-000035-1, "IC REG LINEAR 3.3V 600MA SOT25", Case/Package=SOT-23-5, Dropout Voltage=250mV, Max Input Voltage=6V, Max Operating Temperature=85°C, Max Output Current=600mA, Min Input Voltage=2.5V, Min Operating Temperature=-40°C, Output Voltage=3.3V, Package Quantity=1, Quiescent Current=55uA, Accuracy=1.5%, Height=1.3mm, Lead Free="Lead Free", Length=3.1mm, Mount="Surface Mount", Number of Outputs=1, Number of Pins=5, Number of Regulators=1, Output Current=600mA, Output Type=Fixed, Packaging="Tape and Reel", Polarity=Positive, Width=1.7mm
U4: library part CMP-0243-00165-1, "ARM Cortex-M4 32-bit MCU+FPU, 512 KB Flash, 128 KB RAM, 36 I/Os, 48-Pin UFQFPN, -40 to 85 degC, Tray", I/Os (High Current)=36, Operating Frequency(F) (Processor speed) (MHz)=100, Package Description=UFQFPN48, Package Reference="48-Pin Ultra Thin Fine Pitch Quad Flat No-Lead, 7 x 7 x 0.6 mm Body, 0.5 mm Pitch, Exposed Pad", Supply Voltage(Vcc) min (V)=1.7, ComponentLink1Description="Manufacturer URL", ComponentLink1URL=http://www.st.com/, ComponentLink2Description=Datasheet, ComponentLink2URL=http://www.st.com/st-web-ui/static/active/en/resource/technical/document/datasheet/DM00115249.pdf, Core="ARM Cortex-M4", DatasheetVersion="Rev. 6", FLASH Size (Prog) (kB)=512, Internal RAM Size (kB)=128, Mounting Technology="Surface Mount", Packing=Tray
U5 U7 U8: library part CMP-2000-05026-1, "Intelligent Control LED Integrated Light Source, 3.5 to 5.3 V, -25 to 80 degC, 4-Pin SMD, RoHS, Tape and Reel", Color=Red,Green,Blue(RGB), Manufacturer=Adafruit-Industries-LLC, Package Description="4-Pin Surface Mount Device, Body 5 x 5 mm", Category=Optoelectronics, Configuration=Discrete, Controller Type=-, Datasheet URL=http://datasheet.octopart.com/ADA1655-Adafruit-Industries-datasheet-32028139.pdf, Datasheet Version=May-13, Family=Addressable,Specialty, Interface=-, Manufacturer URL=https://www.adafruit.com/, Mounting Type=SurfaceMount, Number of LEDs=10, Package Reference=1655, Series=Neopixel, Size / Dimension=5.00mmLx5.00mmW, Utilized LED=WS2812(5050)
U6: library part CMP-209535-000002-1, "1A LOW DROPOUT VOLTAGE REGULATOR", RoHS Compliant=Yes
U9: library part CMP-0234-00055-6, "ACCEL 2-16G I2C/SPI 16LGA", Case/Package=LGA, Max Operating Temperature=85°C, Max Supply Voltage=3.6V, Min Operating Temperature=-40°C, Min Supply Voltage=1.71V, Operating Supply Current=11uA, Operating Supply Voltage=2.5V, Package Quantity=1, Axis="X, Y, Z", Bandwidth=5kHz, Contact Plating=Gold, Depth=3mm, Height=1mm, Interface=I2C, Lead Free="Lead Free", Length=3mm, Max Supply Voltage (DC)=3.6V, Min Supply Voltage (DC)=1.71V, Number of Pins=16, Output Type=Digital, Packaging="Tape and Reel", Radiation Hardening=No, REACH SVHC="No SVHC", Resolution=16b, RoHS Compliant=Yes, Sensor Type="3 Axis", Series=-, Width=3mm
X322525MOB4SI: library part "Crystal 25MHz X322525MOB4SI", "Crystal Type:SMD Crystal Resonator Frequency: Frequency Tolerance:±10ppm Frequency Tolerance:±10ppm Frequency Stability:±30ppm Frequency Stability:±30ppm Load Capacitance: Operating Temperature: Operating Temperature:", Frequency Stability=±30ppm, Frequency Tolerance=±10ppm, JLCPCB Part Class="Basic Part", LCSC Part Name="25MHz ±10ppm 12pF", Manufacturer=YXC(扬兴晶振), Manufacturer Part=X322525MOB4SI, Add into BOM=yes, Convert to PCB=yes, Crystal Type="SMD Crystal Resonator", Datasheet=https://atta.szlcsc.com/upload/public/pdf/source/20210329/C112971_1F611BDC486E193C1706F6D8EB5AA189.pdf, Device=X322525MOB4SI, Supplier=LCSC, Supplier Footprint=SMD3225-4P, Supplier Part=C9006, Symbol=X322525MOB4SI

## Free pads (board coordinates)
  round 2.5 hole 1.86: 2(98,23) 2(98,31) 2(98,89) 2(98,97) 2(116,23) 2(116,97) 2(134,23) 2(134,97) 2(152,23) 2(152,31) 2(152,89) 2(152,97)

## Via types
v1: diameter 0.5, hole 0.2, Top Copper to Bottom Copper, tented top, 353 vias
v2: diameter 0.5, hole 0.2, Top Copper to Bottom Copper, 61 vias
v3: diameter 0.508, hole 0.254, Top Copper to Bottom Copper, tented top, 33 vias

## Nets (pads, with @x,y where several pads share a name; then routed paths per layer and width w, separated by ;. In a path a pad name is that pad's centre, name@x,y a point inside that pad or via, vN(x,y) a via of type N, cw(c..) or ccw(c..) an arc to the next point about the centre after c; other vN are vias at no path point)
3V3: C19.2 C20.2 C21.1 C22.1 C23.1 C24.1 C25.1 C26.1 C27.1 C28.2 C36.1 D9.2 D10.2 D15.2 D16.2 J1.3 J2.3 P1.1 R10.2 R12.1 R13.1 R14.2 R19.1 SW4.2 U2.5 U4.1 U4.9 U4.24 U4.36 U4.48 U5.1 U7.1 U8.1 U9.1 U9.14 | length 76.1
  Top Copper w0.254: C27.1@85.495,61.695 85.495,61.594 U4.48@86.629,60.46 86.82,60.268 86.82,60.265 86.815,60.259 86.815,59.916 86.82,59.91 86.82,59.732 U4.1@86.629,59.54 ; C19.2@88.677,53.901 89.266,54.489 89.266,56.52 U4.9@89.457,56.712 ; U4.36@91.437,64.349 91.128,64.658 91.128,65.318 C23.1@91.805,65.995 ; U4.24@95.326,59.54 95.518,59.349 96.77,59.349 96.972,59.147 C22.1@97.252,59.147
  Top Copper w0.305: C26.1@74.152,57.031 74.3,57.179 U9.14@74.3,58.775 ; C25.1@75.419,57.031 75.419,57.131 76.025,57.737 U9.1@76.025,59
  Top Copper w0.508: SW4.2@70.15,81 70.2,80.95 v3(70.2,80.1) ; v3(71.494,63.106) 72.194,63.106 R19.1@72.2,63.1 ; v3(74.1,54.6) 74.1,56.979 C26.1@74.152,57.031 ; R14.2@75.779,64.521 75.8,64.5 75.879,64.5 75.9,64.521 v3(75.9,65.2) ; R14.2@75.9,64.5 R10.2@77.6,64.5 v3(77.6,65.2) ; v3(95.9,82.9) 95.928,82.872 R13.1@96.68,82.872 ; v3(95.93,46.77) R12.1@96.68,46.77 ; J1.3@104.476,37.081 104.5,37.105 v3(104.5,38.2)
  Top Copper w0.635: D10.2@54.077,76.673 54.077,87.577 64.131,97.631 65.101,97.631 D16.2@65.221,97.751 ; C26.1@74.152,57.031 C25.1@75.419,57.031 ; v3(83,64.2) 83,64.19 C27.1@85.495,61.695 ; v3(86.9,52.1) 86.9,52.113 87.6,52.812 C21.1@87.6,52.823 C19.2@88.677,53.901 ; U8.1@87.35,75.573 87.35,70.45 C23.1@91.805,65.995 91.816,65.995 v3(92.321,66.5) ; C22.1@97.252,59.147 97.181,59.218 97.181,59.228 97.674,59.722 v3(97.674,59.9) ; J2.3@104.471,73.09 104.489,73.073 104.489,71.711 v3(104.5,71.7)
  Top Copper w1.27: C36.1@62.135,36.13 62.135,35.02 P1.1@64.135,33.02
  other v1: 138.4,47.3 139.1,47.3 139.8,47.3 138.4,48 139.1,48 139.8,48 138.4,48.7 139.1,48.7 139.8,48.7 140.4,49 141.1,49 138.4,49.4 139.1,49.4 139.8,49.4 138.4,50.1 139.1,50.1 139.8,50.1 138.4,50.8 139.1,50.8 139.8,50.8 138.4,51.5 139.1,51.5 139.8,51.5 138.4,52.2 139.1,52.2 139.8,52.2
  other v3: 86.7,33.1 87.4,33.1 88.2,33.1 88.2,33.8 88.2,34.512 88.2,35.2 62.5,56.1 63.2,56.1 63.9,56.1 62.5,56.8 62.5,57.5 62.519,58.2
5V: C12.2 C13.2 C14.2 C15.2 C16.2 C17.2 C32.1 C33.1 D6.2 D7.2 D8.2 Q1.2 R31.2 U6.2 U6.4 | length 220.1
  Top Copper w2.54: D7.2@49.077,65.673 49.077,66.637 ccw(c46.537,66.637) 46.537,69.177 41.466,69.177 ; D6.2@77.111,15.735 65.805,15.735 cw(c65.805,18.275) 64.469,16.114 63.331,16.82 cw(c64.672,18.977) 63.247,16.874 61.623,17.978 cw(c63.052,20.077) 61.54,18.036 59.964,19.207 cw(c61.481,21.245) 59.884,19.269 58.358,20.506 cw(c59.959,22.477) 58.281,20.571 56.808,21.87 cw(c58.491,23.773) 56.734,21.939 55.317,23.299 cw(c57.079,25.129) 55.246,23.37 53.888,24.789 cw(c55.725,26.543) 53.82,24.863 52.522,26.338 cw(c54.432,28.013) 52.458,26.415 51.223,27.943 cw(c53.201,29.537) 51.162,28.023 49.993,29.602 cw(c52.036,31.11) 49.935,29.683 48.833,31.31 cw(c50.938,32.732) 48.779,31.394 47.747,33.066 cw(c49.91,34.398) 47.696,33.152 46.735,34.866 cw(c48.952,36.105) 46.688,34.954 45.8,36.707 cw(c48.067,37.852) 45.757,36.797 44.943,38.586 cw(c47.257,39.634) 44.904,38.678 44.166,40.499 cw(c46.522,41.449) 44.13,40.593 43.471,42.442 cw(c45.864,43.293) 43.438,42.539 42.857,44.413 cw(c45.284,45.163) 42.829,44.512 42.327,46.41 cw(c44.784,47.056) 42.303,46.508 41.882,48.426 cw(c44.363,48.969) 41.862,48.525 41.522,50.459 cw(c44.024,50.897) 41.506,50.559 41.247,52.506 cw(c43.765,52.838) 41.236,52.606 41.059,54.562 cw(c43.589,54.788) 41.052,54.663 41.003,55.69 cw(c43.54,55.811) 41,55.811 41,64.22 cw(c43.54,64.22) 41.002,64.327 41.033,65.055 cw(c43.571,64.946) 41.04,65.158 41.206,67.121 cw(c43.736,66.904) 41.216,67.221 41.466,69.177 ; D8.2@77.111,104.262 65.798,104.262 ccw(c65.798,101.722) 64.457,103.879 63.233,103.117 ccw(c64.576,100.961) 63.143,103.059 61.52,101.95 ccw(c62.953,99.853) 61.434,101.889 59.859,100.712 ccw(c61.379,98.677) 59.774,100.646 58.251,99.405 ccw(c59.856,97.436) 58.169,99.335 56.699,98.03 ccw(c58.386,96.131) 56.622,97.958 55.206,96.59 ccw(c56.973,94.766) 55.135,96.518 53.778,95.091 ccw(c55.619,93.342) 53.707,95.014 52.413,93.533 ccw(c54.326,91.862) 52.345,93.451 51.115,91.918 ccw(c53.097,90.329) 51.049,91.832 49.886,90.248 ccw(c51.934,88.746) 49.826,90.163 49.588,89.808 48.73,88.53 ccw(c50.838,87.114) 48.672,88.44 47.645,86.762 ccw(c49.813,85.438) 47.594,86.674 46.637,84.951 ccw(c48.859,83.72) 46.589,84.861 45.706,83.099 ccw(c47.978,81.964) 45.663,83.008 44.855,81.211 ccw(c47.173,80.171) 44.815,81.116 44.084,79.288 ccw(c46.444,78.347) 44.048,79.191 43.396,77.334 ccw(c45.792,76.493) 43.363,77.234 42.789,75.351 ccw(c45.22,74.613) 42.762,75.253 42.268,73.348 ccw(c44.727,72.711) 42.244,73.244 41.831,71.321 ccw(c44.315,70.79) 41.812,71.218 41.48,69.277 ccw(c43.985,68.853) 41.466,69.177 ; 79.4,20.6 88.6,20.6 93.72,25.72 137.72,25.72 149.82,37.82 149.82,40.04 U6.4@150.141,40.361
Emitter1: Q2.1 R23.2 U4.19 | length 48.1
  Top Copper w0.254: U4.19@93.559,57.773 93.559,57.77 94.6,56.728 94.6,56.367 96.7,54.267 v1(96.7,54.2)
  Top Copper w0.305: Q2.1@73.55,22.6 74.9,22.6 75.3,23 R23.2@75.4,23
  Top Copper w0.508: Q2.1@73.55,22.6 73.596,22.646 73.596,23.483 v1(73.702,23.59)
  Bottom Copper w0.254: v1(73.702,23.59) 73.702,31.202 v1(96.7,54.2)